# Altium PCB MasterPcb.PcbDoc
Units mm, origin at the board's own origin, x right, y up, seen from the top; angles counter-clockwise.
Board outline 103.04 x 113.79 mm, 2 copper layers (Top Layer, Bottom Layer); 52 components, 52 nets, 245 pads, 110 vias.
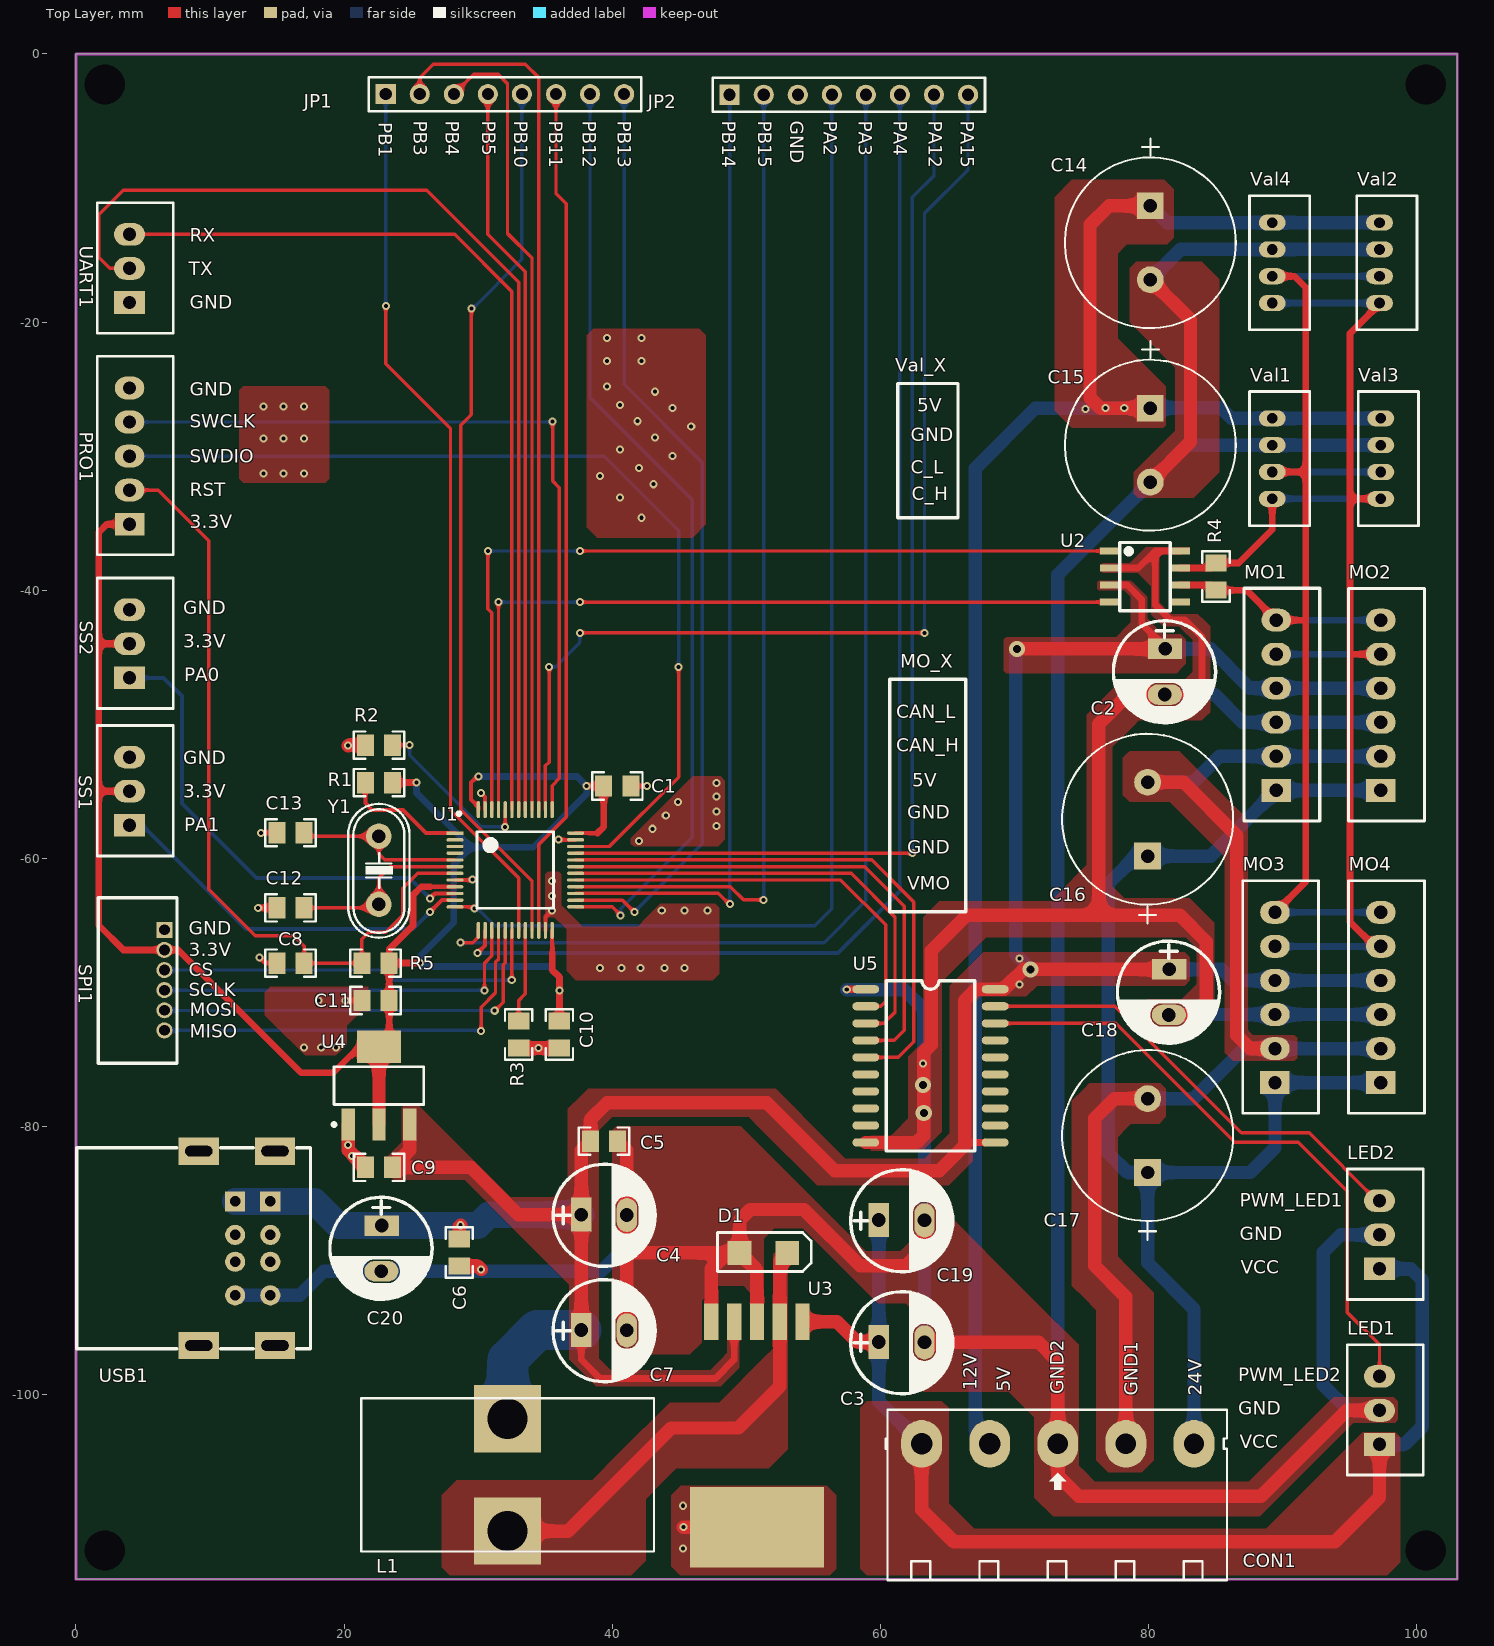
[diagram p0: Top Layer view]
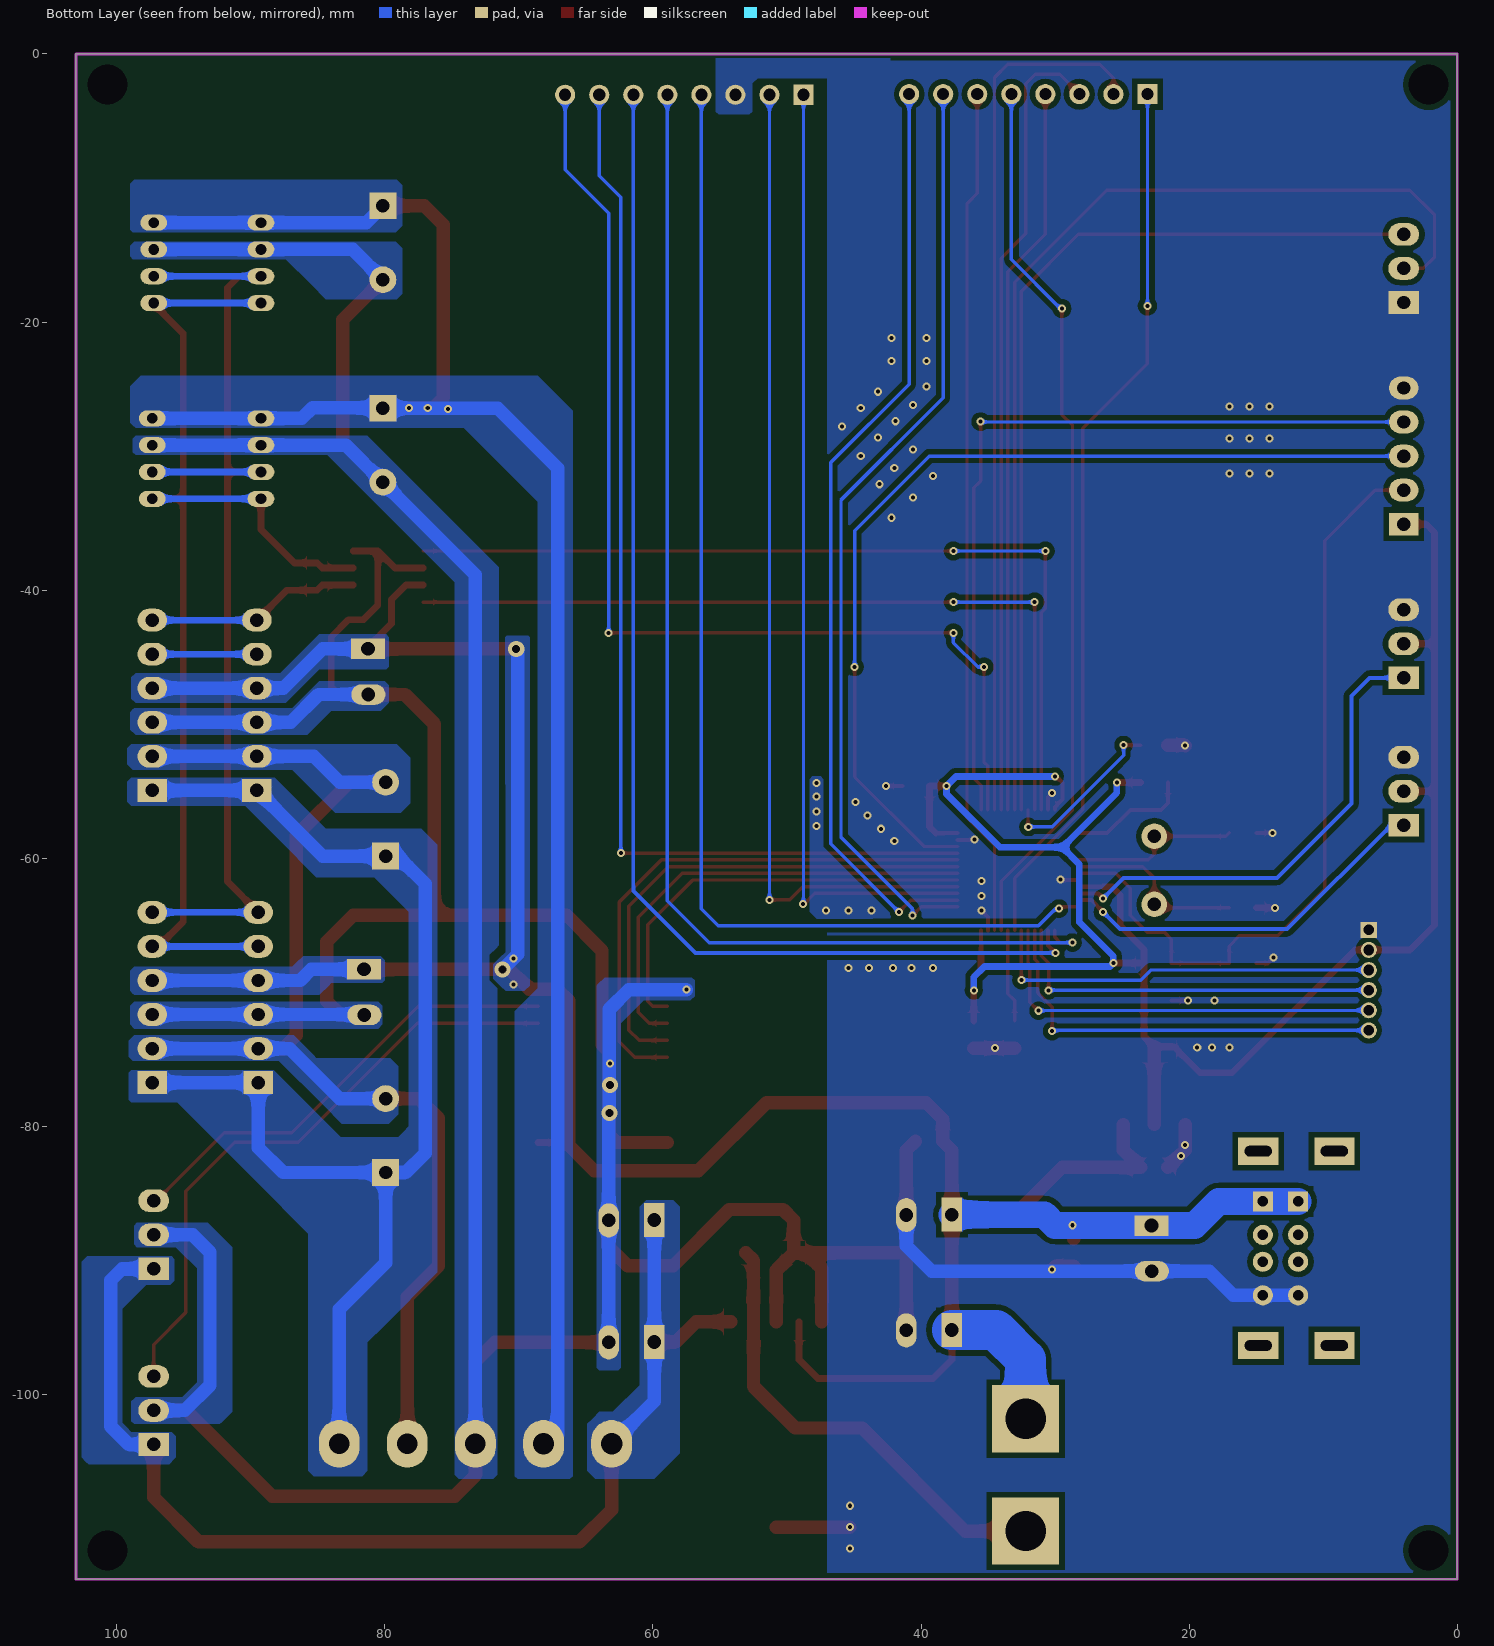
[diagram p1: Bottom Layer view, seen from below]

## Layer stack, top to bottom
Top Solder: solder mask 0.0102, Solder Resist, Dk 3.5
Top Layer: signal copper 0.0356
Dielectric 1: dielectric 0.32, FR-4, Dk 4.8
Bottom Layer: signal copper 0.0356
Bottom Solder: solder mask 0.0102, Solder Resist, Dk 3.5

## Board outline
0,-113.792 103.045,-113.792 103.045,0 0,0

## Design rules (kind name [scope] priority, off if disabled: settings)
Clearance [All] p1: gap=0.2
HoleSize [All] p1: absolutevalues=TRUE maxlimit=2.54 minlimit=0.3 maxpercent=80.000 minpercent=20.000
MinimumSolderMaskSliver [All] p1: minsoldermaskwidth=0
PolygonConnect [All] p1: connectstyle=Direct reliefconductorwidth=0.254 reliefentries=4 polygonreliefangle="90 Angle" airgapwidth=0.254
RoutingVias [All] p1: holewidth=1 width=2 viastyle="Through Hole" minholewidth=0.3 minwidth=0.3 maxholewidth=2 maxwidth=5
SilkToBoardRegionClearance [All] p1 off:
SilkToSolderMaskClearance [IsPad] p1: minsilkscreentomaskgap=0 clearancetoexposedcopper=TRUE
SolderMaskExpansion [All] p1: expansion=0.102
Width [All] p1: maxlimit=5 minlimit=0.254 preferedwidth=0.508
26 further rules are at their usual default settings.

## Components (designator, comment, footprint, x,y, rotation, side; value= is the part's Value field where it differs from the comment)
C1 "104" 0805_HV 40.386,-54.61 r180 top
C2 "390uF" CP1/3.0 81.244,-46.086 r270 top
C3 "390uF" CP1/3.0 61.6,-96.1 r0 top
C4 "390uF" CP1/3.0 39.4,-86.6 r0 top
C5 "104" 0805_HV 39.4,-81.1 r180 top
C6 "104" 0805_HV 28.6,-89.4 r90 top
C7 "390uF" CP1/3.0 39.4,-95.2 r0 top
C8 "104" 0805_HV 16.002,-67.818 r0 top
C9 "105" 0805_HV 22.606,-83.058 r0 top
C10 "105" 0805_HV 36.068,-73.152 r90 top
C11 "105" 0805_HV 22.352,-70.612 r0 top
C12 "22P" 0805_HV 16,-63.7 r0 top
C13 "22P" 0805_HV 16,-58.1 r0 top
C14 "390uF" "CAP_12.5 X 25" 80.144,-14.086 r270 top
C15 "390uF" "CAP_12.5 X 25" 80.144,-29.186 r270 top
C16 "390uF" "CAP_12.5 X 25" 79.944,-57.086 r90 top locked
C17 "390uF" "CAP_12.5 X 25" 79.944,-80.686 r90 top
C18 "390uF" CP1/3.0 81.544,-69.986 r270 top locked
C19 "390uF" CP1/3.0 61.6,-87 r0 top
C20 "390uF" CP1/3.0 22.8,-89.1 r270 top
CON1 "CON 5 EDG 5.08_MH" "Con 5 EDG 5.08" 73.244,-103.686 r0 top locked
D1 "IN5822" SOD123 50.4,-88.8 r180 top
JP1 "Jump 8_MH" "Jump 8" 32,-3 r0 top
JP2 "Jump 8_MH" "Jump 8" 57.658,-3.048 r0 top
L1 "100uF" IND_2118-V-RC 32.2,-106 r90 top locked
LED1 "Header 3_MH" "HEADER 3" 97.244,-101.186 r90 top
LED2 "Header 3_MH" "HEADER 3" 97.244,-88.086 r90 top
MO1 "Header 6" "HEADER 6" 89.544,-48.586 r90 top
MO2 "Header 6" "HEADER 6" 97.344,-48.586 r90 top
MO3 "Header 6" "HEADER 6" 89.444,-70.386 r90 top
MO4 "Header 6" "HEADER 6" 97.344,-70.386 r90 top
PRO1 "Header 5_MH" "HEADER 5" 4,-30 r90 top
R1 "0R" 0805_HV 22.606,-54.356 r0 top
R2 "100K" 0805_HV 22.606,-51.562 r0 top
R3 "100K" 0805_HV 33.02,-73.152 r270 top
R4 "120" 0805_HV 85.044,-38.986 r90 top
R5 "10K" 0805_HV 22.352,-67.818 r0 top
SPI1 "Jump 6" "ZH 1.5 6P" 6.604,-69.088 r270 top
SS1 "Header 3_MH" "HEADER 3" 4,-55 r90 top
SS2 "Header 3_MH" "HEADER 3" 4,-44 r90 top
U1 "STM32F103C8T6 LQFP48 _MH" LQFP48 32.8,-60.9 r0 top
U2 "TJA1050T/CM,118" "SOP 8" 79.744,-38.986 r270 top
U3 "LM2576HVS" TO263-5 50.8,-94.6 r180 top locked
U4 "AMS1117-3.3V SOT223 _MH" SOT223 22.606,-76.962 r0 top
U5 "74HC573" SOIC-20 63.744,-75.486 r0 top
UART1 "Header 3_MH" "HEADER 3" 4,-16 r90 top
USB1 "USB A CAI_DOI_MH" USB_KEP 14.5,-89.1 r90 top
Val1 "Header 4" JST-PH2.00-4P 89.244,-30.186 r90 top
Val2 "Header 4" JST-PH2.00-4P 97.244,-15.586 r90 top
Val3 "Header 4" JST-PH2.00-4P 97.344,-30.186 r90 top
Val4 "Header 4" JST-PH2.00-4P 89.244,-15.586 r90 top
Y1 "8MHZ" XT2 22.6,-60.9 r90 top

## Footprints (in the part's own frame and the unit in brackets; to place one, negate y for a bottom-side part, rotate by r counter-clockwise, add the part's x,y. Pads: shape width x height; smd on the part's side, far side on the other; paste and mask are expansions set on the pad)
0805_HV [mil] "0805 with 30mil clearance between pads"
  rect 50x63 smd: 1(-40,0) 2(40,0)
  silkscreen extent -74,-40 74,40, body extent -43,-29 43,29, height 57
"CAP_12.5 X 25" [mm] "0805 with 30mil clearance between pads"
  rect 2x2 hole 1 mask-25.4: 1(-2.756,0)
  round 2 hole 1 mask-25.4: 2(2.756,0)
  silkscreen extent -7.77,-6.37 6.37,6.38, body extent -6.25,-6.24 6.23,6.24, height 24.99
"Con 5 EDG 5.08" [mil]
  oval 120x140 hole 62.99: 1(-400,0) 2(-200,0)
  oval 120x140 hole 60: 3(0,0) 4(200,0) 5(400,0)
  silkscreen extent -505,-400 497,100, body extent -498,-403 498,69, height 334
CP1/3.0 [mil]
  rect 60x100 hole 40: 1(-67,0.5)
  oval 60x100 hole 40: 2(67,-0.5)
  silkscreen extent -150,-151 150,148, body extent -156,-161 159,154, height 453
"HEADER 3" [mm]
  rect 1.7x2.3 hole 1 paste+0: 1(-2.54,0)
  oval 1.7x2.3 hole 1 paste+0: 2(0,0) 3(2.54,0)
  silkscreen extent -4.83,-3.25 4.9,2.41
"HEADER 5" [mm]
  rect 1.7x2.2 hole 1: 1(-5.08,0)
  oval 1.7x2.2 hole 1: 2(-2.54,0) 3(0,0) 4(2.54,0) 5(5.08,0)
  silkscreen extent -7.37,-3.25 7.44,2.41
"HEADER 6" [mm]
  rect 1.7x2.2 hole 1: 1(-6.35,0)
  oval 1.7x2.2 hole 1: 2(-3.81,0) 3(-1.27,0) 4(1.27,0) 5(3.81,0) 6(6.35,0)
  silkscreen extent -8.64,-3.25 8.71,2.41
IND_2118-V-RC [mm] "INDUCTOR,2 LEAD,VERTICAL MOUNT,8.382mm PITCH,TH"
  rect 5x5 hole 3: 1(-4.191,0) 2(4.191,0)
  silkscreen extent -5.72,-10.92 5.72,10.92, body extent -5.72,-10.92 5.72,10.92, height 21.84
JST-PH2.00-4P [mm]
  oval 1.2x2 hole 0.8 paste+0: 1(3,0) 2(1,0) 3(-1,0) 4(-3,0)
  silkscreen extent -5,-2.8 5,1.7, body extent -4.93,-2.97 4.93,1.7, height 5.89
"Jump 8" [mm]
  rect 1.5x1.5 hole 0.9: 1(-8.89,0)
  round 1.5 hole 0.9: 2(-6.35,0) 3(-3.81,0) 4(-1.27,0) 5(1.27,0) 6(3.81,0) 7(6.35,0) 8(8.89,0)
  silkscreen extent -10.16,-1.27 10.16,1.27, body extent -10.16,-1.27 10.16,1.27, height 7
LQFP48 [mm]
  rect 1.27x0.25 smd: 1(-4.524,2.775)
  oval 1.27x0.25 smd: 2(-4.524,2.275) 3(-4.524,1.775) 4(-4.524,1.275) 5(-4.524,0.775) 6(-4.524,0.275) 7(-4.524,-0.225) 8(-4.524,-0.725) 9(-4.524,-1.225) 10(-4.524,-1.725) 11(-4.524,-2.225) 12(-4.524,-2.725) 25(4.473,-2.725) 26(4.473,-2.225) 27(4.473,-1.725) 28(4.473,-1.225) 29(4.473,-0.725) 30(4.473,-0.225) 31(4.473,0.275) 32(4.473,0.775) 33(4.473,1.275) 34(4.473,1.775) 35(4.473,2.275) 36(4.473,2.775)
  oval 0.25x1.27 smd: 13(-2.775,-4.473) 14(-2.275,-4.473) 15(-1.775,-4.473) 16(-1.275,-4.473) 17(-0.775,-4.473) 18(-0.275,-4.473) 19(0.225,-4.473) 20(0.725,-4.473) 21(1.225,-4.473) 22(1.725,-4.473) 23(2.225,-4.473) 24(2.725,-4.473) 37(2.725,4.524) 38(2.225,4.524) 39(1.725,4.524) 40(1.225,4.524) 41(0.725,4.524) 42(0.225,4.524) 43(-0.275,4.524) 44(-0.775,4.524) 45(-1.275,4.524) 46(-1.775,4.524) 47(-2.275,4.524) 48(-2.775,4.524)
  silkscreen extent -4.35,-2.82 2.82,4.35, body extent -4.53,-4.47 4.47,4.53, height 1.5
SOD123 [mil]
  rect 70x70 smd: 1(35,25) 2(-105,25)
  silkscreen extent -175,-35 100,80, body extent -139,-29 66,73, height 95
SOIC-20 [mm]
  oval 2x0.6 smd: 1(-4.826,5.715) 2(-4.826,4.445) 3(-4.826,3.175) 4(-4.826,1.905) 5(-4.826,0.635) 6(-4.826,-0.635) 7(-4.826,-1.905) 8(-4.826,-3.175) 9(-4.826,-4.445) 10(-4.826,-5.715) 11(4.826,-5.715) 12(4.826,-4.445) 13(4.826,-3.175) 14(4.826,-1.905) 15(4.826,-0.635) 16(4.826,0.635) 17(4.826,1.905) 18(4.826,3.175) 19(4.826,4.445) 20(4.826,5.715)
  silkscreen extent -3.3,-6.35 3.3,6.35, body extent -5.31,-6.5 5.31,6.5, height 2.56
"SOP 8" [mil] "LQFP64"
  rect 20x60 smd: 1(-75,-102.5) 2(-25,-102.5) 3(25,-102.5) 4(75,-102.5) 5(75,102.5) 6(25,102.5) 7(-25,102.5) 8(-75,102.5)
  silkscreen extent -100,-75 100,75, body extent -98,-120 100,117, height 63
SOT223 [mm]
  rect 1x2.4 smd: 1(-2.3,-2.9) 2(0,-2.9) 3(2.3,-2.9)
  rect 3.3x2.4 smd: 4(0,2.9)
  silkscreen extent -3.47,-3.02 3.35,1.4, body extent -3.25,-3.56 3.25,3.4, height 1.68
TO263-5 [mm] "LM2576-SMD"
  rect 1.07x2.75 smd: 1(-3.4,-0.025) 2(-1.7,-0.025) 3(0,-0.025) 4(1.7,-0.025) 5(3.4,-0.025)
  rect 10x6 smd: 6(0,15.289)
  body extent -5,-0.38 5,15.29, height 4.79
USB_KEP [mm]
  rect 1.5x1.5 hole 0.787: 1(3.5,0) 8(3.5,2.62)
  round 1.5 hole 0.787: 2(1,0) 3(-1,0) 4(-3.5,0) 5(-3.5,2.62) 6(-1,2.62) 7(1,2.62)
  rect 2.032x3 hole 0.787 slot 2.032 at 90 deg: 9(7.25,5.33) 10(7.25,-0.35) 11(-7.25,-0.35) 12(-7.25,5.33)
  silkscreen extent -7.5,-3 7.5,14.45, body extent -7.83,-1.36 7.87,16.24, height 16.1
XT2 [mm] "Footpin for Crystal 2 pin"
  round 1.905 hole 1: 1(-2.54,0) 2(2.54,0)
  silkscreen extent -5.03,-2.29 4.96,2.29, body extent -5.93,-2.36 5.42,2.29, height 3.5
"ZH 1.5 6P" [mm]
  rect 1.2x1.2 hole 0.8: 1(-3.749,0)
  round 1.2 hole 0.8: 2(-2.25,0) 3(-0.749,0) 4(0.749,0) 5(2.25,0) 6(3.749,0)
  silkscreen extent -6.15,-4.93 6.2,0.94, body extent -5.96,-4.75 6.04,0.25, height 3.71

## Part data
C1 C8: library part "Capacitor 0805", "Ceramic Chip Capacitor - Standard"
C2 C3 C4 C7 C18 C19 C20: library part "Capacitor TuHoa"
C5 C6 C9 C10 C11 C12 C13: library part CM, "Cap SMD"
C14 C15 C16 C17: library part "Capacitor TuHoa", "CAP ALUM 390UF 20% 50V RADIAL"
CON1: "CON 5 EDG 5.08 (xanh cong)"
D1: library part "Diode S4 SOD123 ( 1N5819 SOD123)_MH", "Diode S4 SOD123 ( 1N5819 SOD123)"
JP1 JP2: "Jump 8P 2.54"
L1: library part "Inductor Lm2576_MH", "cuon cam"
LED1 LED2 SS1 SS2 UART1: "Header 3P XH2.54 th?ng"
MO1 MO2 MO3 MO4: "Header, 6-Pin"
PRO1: "Header 5P XH2.54 th?ng"
R1 R2 R3 R4 R5: library part "R nho", "RES, 100, 1%, 0.1 W, 0402"
SPI1: "Jump 6P 2.54"
U3: library part "LM2576HVS-5.0V BUCK 5V 3A TO263-5 _MH", "LM2576HVS-5.0V BUCK 5V 3A TO263-5 _MH"
U5: library part "74HC573 DIP20 IC Flip-Flop_MH", "Octal D-Type Latch with 3-State Output Non-Inverting"
Val1 Val2 Val3 Val4: "Header, 4-Pin"
Y1: library part "CRYSTAL_49S DIP_MH", "Crystal Oscillator"

## Free pads (board coordinates)
  round 2.3 hole 3 paste+0: 0(100.696,-111.633) 1(100.696,-2.286) 2(2.144,-2.286) 3(2.144,-111.633)

## Via types
v1: diameter 0.6, hole 0.3, Top Layer to Bottom Layer, tented both sides, 106 vias
v2: diameter 1.2, hole 0.6, Top Layer to Bottom Layer, tented both sides, 4 vias

## Nets (pads, with @x,y where several pads share a name; then routed paths per layer and width w, separated by ;. In a path a pad name is that pad's centre, name@x,y a point inside that pad or via, vN(x,y) a via of type N, cw(c..) or ccw(c..) an arc to the next point about the centre after c; other vN are vias at no path point)
3.3V: C1.2 C10.2 C11.2 PRO1.1 R1.2 R5.2 SPI1.2 SS1.2 SS2.2 U1.9 U1.24 U1.36 U1.48 U4.2 U4.4 | length 152.7
  Top Layer w0.3: 26.416,-62.125 U1.9 ; v1@29.972,-53.848 29.464,-54.356 29.464,-55.626 30.025,-56.187 U1.48 ; 35.525,-67.056 U1.24 ; U1.36 38.903,-58.125
  Top Layer w0.5: SS1.2 1.7,-55 ; SS2.2 1.7,-44 ; PRO1.1 2.32,-35.08 1.7,-35.7 1.7,-44 ; R1.2 v1(25.4,-54.356) ; v1(25.654,-67.818) R5.2 ; 26.416,-62.125 25.759,-62.125 25.146,-62.738 25.146,-65.024 23.368,-66.802 R5.2 ; 35.525,-67.056 35.525,-68.325 36.068,-68.868 v1(36.068,-69.85) C10.2 ; v1(38.1,-54.61) C1.2 39.37,-57.658 38.903,-58.125 ; 1.7,-55 1.7,-65 3.538,-66.838 SPI1.2 7.638,-66.838 16.8,-76 19.2,-76 21.138,-74.062 U4.4 23.368,-73.3 C11.2 R5.2 ; 1.7,-55 1.7,-44
  Top Layer w1: U4.2 U4.4
  Bottom Layer w0.5: v1(25.4,-54.356) 25.4,-55.118 29.464,-59.182 ; v1(30.025,-53.901) 37.391,-53.901 v1(38.1,-54.61) 38.1,-55.2 34.118,-59.182 29.464,-59.182 ; v1(36.068,-69.85) 36.068,-68.868 35.272,-68.072 25.908,-68.072 v1(25.654,-67.818) 25.654,-67.31 28.194,-64.77 28.194,-60.452 29.464,-59.182
5V_RC: C14.1 C15.1 CON1.2 Val1.1 Val2.1 Val3.1 Val4.1 | length 146.1
  Top Layer w1: C15.1 76.43,-26.43 75.644,-25.644 75.644,-12.756 77.07,-11.33 C14.1
  Bottom Layer w1: CON1.2 67.1,-102.622 67.1,-30.9 71.57,-26.43 C15.1 80.174,-26.4 85.4,-26.4 86.186,-27.186 Val1.1 Val3.1 ; C14.1 81.4,-12.586 Val4.1 Val2.1
  other v1: 75.3,-26.5 76.8,-26.43 78.2,-26.43
12V: C3.1 C19.1 CON1.1 LED1.1 LED2.1 U3.1 | length 87.9
  Top Layer w1: U3.1 56.775,-94.575 58.287,-96.087 C3.1 ; CON1.1 63.084,-108.584 65.5,-111 93.9,-111 97.244,-107.656 LED1.1
  Bottom Layer w1: C19.1 C3.1 59.898,-100.5 CON1.1 ; LED1.1 99.104,-103.726 100.444,-102.386 100.444,-91.486 99.584,-90.626 LED2.1
24V: C16.1 C17.1 CON1.5 MO1.1 MO2.1 MO3.1 MO4.1 | length 91.6
  Bottom Layer w1: CON1.5 83.404,-93.646 79.944,-90.186 C17.1 ; MO4.1 MO3.1 89.444,-81.586 87.588,-83.442 C17.1 ; MO2.1 MO1.1 84.638,-59.842 C16.1 79.058,-59.842 77,-61.9 77,-82 78.442,-83.442 C17.1
BOOT0: R2.2 U1.44 | length 12.6
  Top Layer w0.254: R2.2 v1(24.892,-51.562) ; v1(32.004,-57.658) 32.025,-57.637 U1.44
  Bottom Layer w0.254: v1(24.892,-51.562) 24.892,-52.324 30.226,-57.658 v1(32.004,-57.658)
BOOT1: R3.1 U1.20 | length 7
  Top Layer w0.254: R3.1 33.02,-70.612 33.525,-70.107 U1.20
CAN_H: MO1.5 MO2.5 MO3.5 MO4.5 R4.2 U2.7 Val1.4 Val2.4 Val3.4 Val4.4 | length 96.8
  Top Layer w0.5: U2.7 84.663,-38.351 R4.2 86.744,-37.97 89.244,-35.47 Val1.4 ; 95.134,-44.776 MO2.5 ; Val2.4 97.244,-18.656 95.044,-20.856 95.044,-33.186 ; MO4.5 96.876,-66.576 95.044,-64.744 95.044,-33.186 ; Val3.4 95.044,-33.186
  Bottom Layer w0.5: Val1.4 Val3.4 ; Val4.4 Val2.4 ; MO3.5 MO4.5 ; MO1.5 MO2.5
CAN_L: MO1.6 MO2.6 MO3.6 MO4.6 R4.1 U2.6 Val1.3 Val2.3 Val3.3 Val4.3 | length 95.2
  Top Layer w0.5: U2.6 84.663,-39.621 R4.1 87.31,-40.002 MO1.6 91.694,-42.236 91.744,-42.186 ; Val1.3 91.744,-31.186 ; Val4.3 90.886,-16.586 91.744,-17.444 91.744,-31.186 ; MO3.6 91.744,-61.736 91.744,-42.186 ; 91.744,-42.186 91.744,-31.186
  Bottom Layer w0.5: Val1.3 Val3.3 ; Val4.3 Val2.3 ; MO3.6 MO4.6 ; MO1.6 MO2.6
CAN_RX: U1.45 U2.4 | length 61.1
  Top Layer w0.254: U1.45 v1(31.525,-40.894) ; v1(37.592,-40.891) U2.4
  Bottom Layer w0.254: v1(31.525,-40.894) v1@37.589,-40.894
CAN_TX: U1.46 U2.1 | length 65.8
  Top Layer w0.254: v1(30.734,-37.084) 30.734,-41.402 31.025,-41.693 U1.46 ; v1(37.592,-37.081) U2.1
  Bottom Layer w0.254: v1(30.734,-37.084) 30.737,-37.081 v1(37.592,-37.081)
GND: C16.2 C17.2 CON1.4 MO1.2 MO2.2 MO3.2 MO4.2 | length 93.4
  Top Layer w1: CON1.4 78.324,-92.724 76,-90.4 76,-79.4 77.47,-77.93 C17.2 ; C16.2 82.63,-54.33 86.6,-58.3 86.6,-73.2 87.596,-74.196 MO3.2
  Bottom Layer w1: C17.2 83.37,-77.93 87.104,-74.196 MO3.2 MO4.2 ; C16.2 83.37,-54.33 85.304,-52.396 MO2.2
GND_MCU: C1.1 C2.2 C3.2 C4.2 C5.1 C6.1 C7.2 C8.1 C9.1 C10.1 C11.1 C12.1 C13.1 C14.2 C15.2 C18.2 C19.2 C20.2 CON1.3 D1.1 JP2.3 LED1.2 LED2.2 MO1.3 MO2.3 MO3.3 MO4.3 PRO1.5 R2.1 R3.2 SPI1.1 SS1.3 SS2.3 U1.8 U1.23 U1.35 U1.47 U2.2 U2.8 U3.3 U3.5 U3.6 U4.1 U5.1 U5.10 UART1.1 USB1.4 USB1.5 Val1.2 Val2.2 Val3.2 Val4.2 | length 466.2
  Top Layer w0.3: v1(13.7,-67.4) 14.118,-67.818 C8.1 ; v1(13.8,-58.1) C13.1 ; v1(20.1,-70.6) 20.112,-70.612 C11.1 ; U1.8 29.575,-61.625 v1(29.6,-61.6) ; v1(30.226,-55.118) 30.525,-55.417 U1.47 ; U1.23 35.025,-64.375 v1(35.5,-63.9) ; v1(36,-58.6) 36.012,-58.6 36.037,-58.625 U1.35 ; C1.1 42.59,-54.61 v1(42.6,-54.6)
  Top Layer w0.5: v1(13.6,-63.7) C12.1 ; v1(57.5,-69.8) 57.5,-69.788 57.483,-69.771 U5.1 ; U2.2 79.249,-38.351 80.519,-37.081 ; C2.2@81.5,-47.788 83.412,-47.788 84,-47.2 84,-43.5 82.7,-42.2 81.6,-42.2 80.519,-41.119 80.519,-37.081 ; U2.8 80.519,-37.081
  Top Layer w1: v1(20.3,-51.6) 20.338,-51.562 R2.1 ; U4.1 20.306,-81.774 C9.1 ; C6.1 29.964,-90.416 v1(30.226,-90.678) ; R3.2 C10.1 ; C5.1 41.102,-81.786 C4.2 41.102,-89.4 ; C7.2 41.102,-89.4 ; v1(45.311,-109.889) U3.6 ; U3.5 47.4,-90.6 48.565,-89.435 D1.1 ; U3.3 50.8,-90.724 D1.1 ; U5.10 62.699,-81.201 63.246,-80.654 v2(63.246,-78.994) 63.246,-74.454 63.8,-73.9 63.8,-66.9 66.438,-64.262 76.3,-64.262 ; C3.2 71.813,-96.113 73.244,-97.544 CON1.3 73.244,-106.044 74.8,-107.6 88.4,-107.6 90.6,-105.4 94.814,-101.186 LED1.2 ; C19.2 63.302,-88.998 61.9,-90.4 58.5,-90.4 54.3,-86.2 50.3,-86.2 49.511,-86.989 D1.1 ; C15.2 83.144,-28.942 83.144,-19.842 C14.2 ; C2.2@81.5,-47.788 C2.2 78.5,-47.788 76.3,-49.988 76.3,-64.262 ; C18.2 83.312,-71.688 84.328,-70.672 84.328,-66.228 82.362,-64.262 76.3,-64.262 ; 41.102,-89.4 41.137,-89.435 D1.1
  Bottom Layer w1: USB1.5 USB1.4 16.7,-92.6 18.498,-90.802 C20.2 39.198,-90.802 41.102,-88.898 C4.2 ; v1(57.5,-69.8) 61.8,-69.8 63.246,-71.246 v2(63.246,-78.994) 63.302,-79.05 C19.2 C3.2 ; CON1.3 73.244,-38.842 C15.2 82.9,-29.186 Val1.2 Val3.2 ; C14.2 82.4,-14.586 Val4.2 Val2.2 ; C2.2 84.946,-47.788 87.014,-49.856 MO1.3 MO2.3 ; C18.2 81.563,-71.656 MO3.3 MO4.3 ; LED1.2 94.93,-101.186 93.044,-99.3 93.044,-89.386 94.344,-88.086 LED2.2
  other v1: 45.3,-111.5 45.3,-108.3 20.6,-82.2 20.3,-81.4 63.2,-75.3 34.5,-74.168 17,-74.1 18.3,-74.1 19.4,-74.1 18.1,-70.6 39.1,-68.2 40.7,-68.2 42.1,-68.2 43.9,-68.2 45.4,-68.2 43.7,-63.9 45.4,-63.9 47.1,-63.9 35.5,-62.8 35.5,-61.7 42,-58.7 43,-57.8 47.8,-57.6 44,-56.8 47.8,-56.5 44.9,-55.8 47.8,-55.4 47.8,-54.4 42.2,-34.6 40.6,-33.1 43.1,-32.1 39.1,-31.5 14,-31.3 15.5,-31.3 17,-31.3 42,-30.9 44.5,-30 40.6,-29.5 14,-28.7 15.5,-28.7 17,-28.7 43.2,-28.6 45.9,-27.8 41.9,-27.4 44.5,-26.4 14,-26.3 15.5,-26.3 17,-26.3 40.6,-26.2 43.2,-25.2 39.6,-24.8 39.6,-22.9 42.2,-22.9 39.6,-21.2 42.2,-21.2
  other v2: 63.2,-76.9
MISO: SPI1.6 U1.16 | length 31.7
  Top Layer w0.254: v1(30.226,-72.898) 30.226,-71.12 31.296,-70.05 31.296,-67.764 31.525,-67.535 U1.16
  Bottom Layer w0.254: SPI1.6 30.165,-72.837 v1(30.226,-72.898)
MO_5V: C2.1 C4.1 C5.2 C6.2 C7.1 C9.2 C18.1 C20.1 L1.2 MO1.4 MO2.4 MO3.4 MO4.4 U2.3 U3.4 U4.3 U5.11 U5.20 USB1.1 USB1.8 | length 228.4
  Top Layer w0.5: C7.1@37.698,-94.6 C7.1 37.698,-97.398 39.1,-98.8 47.7,-98.8 49.1,-97.4 U3.4 ; 66.294,-81.201 U5.11 ; U2.3 78.421,-39.621 79.5,-40.7 79.5,-42.5 81.257,-44.257 C2.1
  Top Layer w1: U4.3 24.906,-81.774 C9.2 29.464,-83.058 32.993,-86.587 C4.1 ; C6.2 28.6,-87.478 v1(28.702,-87.376) ; C7.1@37.698,-94.6 C4.1 ; v2(70.2,-44.4) 70.216,-44.384 C2.1 ; C18.1 v2(71.216,-68.284) 70.716,-68.284 69.229,-69.771 U5.20 67.135,-69.771 66.294,-70.612 66.294,-81.201 66.294,-81.406 64.388,-83.312 56.612,-83.312 51.532,-78.232 39.624,-78.232 38.384,-79.472 C5.2 37.698,-81.786 C4.1
  Bottom Layer w1: v2(70.2,-44.4) 70.1,-44.5 70.1,-67.168 v2(71.216,-68.284) ; C2.1 84.642,-44.384 87.574,-47.316 MO1.4 MO2.4 ; C18.1 85.484,-68.284 86.316,-69.116 MO3.4 MO4.4
  Bottom Layer w2: USB1.8 USB1.1 17.8,-85.6 19.598,-87.398 C20.1 30.002,-87.398 30.813,-86.587 C4.1
  Bottom Layer w3: L1.2 32.2,-97.4 34.413,-95.187 C7.1
  other v1: 70.4,-69.4 70.4,-67.468
MOSI: SPI1.5 U1.17 | length 31
  Top Layer w0.254: v1(31.242,-71.374) 31.885,-70.731 31.885,-67.937 32.025,-67.797 U1.17
  Bottom Layer w0.254: SPI1.5 v1(31.242,-71.374)
NetD1_2: D1.2 L1.1 U3.2 | length 35
  Top Layer w1: L1.1 36.709,-110.191 44.4,-102.5 49.4,-102.5 52.5,-99.4 U3.2 52.5,-90.002 D1.2
OSCIN: C13.2 U1.5 Y1.2 | length 12.9
  Top Layer w0.254: C13.2 17.276,-58.36 Y1.2 22.6,-59.684 23.041,-60.125 U1.5
OSCOUT: C12.2 U1.6 Y1.1 | length 13.7
  Top Layer w0.254: C12.2 22.406,-63.7 Y1.1@22.633,-63.473 ; Y1.1 22.6,-61.474 23.449,-60.625 U1.6
PA0: SS2.1 U1.10 | length 35.9
  Top Layer w0.3: v1(26.416,-62.992) 26.783,-62.625 U1.10
  Bottom Layer w0.3: SS2.1 6.54,-46.54 7.9,-47.9 7.9,-55.906 13.462,-61.468 24.892,-61.468 v1(26.416,-62.992)
PA1: SS1.1 U1.11 | length 28.4
  Top Layer w0.3: v1(26.416,-64.008) 27.299,-63.125 U1.11
  Bottom Layer w0.3: SS1.1 4.962,-57.54 12.7,-65.278 25.146,-65.278 v1(26.416,-64.008)
PA2: JP2.4 U1.12 | length 89.9
  Top Layer w0.254: U1.12 29.589,-63.625 v1(29.718,-63.754)
  Bottom Layer w0.254: v1(29.718,-63.754) 29.972,-63.754 31.242,-65.024 55.118,-65.024 56.388,-63.754 JP2.4
PA3: JP2.5 U1.13 | length 93.6
  Top Layer w0.254: v1(28.702,-66.294) 29.606,-66.294 30.025,-65.875 U1.13
  Bottom Layer w0.254: v1(28.702,-66.294) 55.806,-66.294 58.928,-63.172 JP2.5
PA4: JP2.6 U1.14 | length 94.7
  Top Layer w0.3: v1(29.972,-67.056) 30.525,-66.503 U1.14
  Bottom Layer w0.254: 61.468,-62.1 JP2.6
  Bottom Layer w0.3: v1(29.972,-67.056) 56.844,-67.056 61.468,-62.432 61.468,-62.1
PA12: JP2.7 U1.33 | length 82.3
  Top Layer w0.254: U1.33 v1@62.4,-59.625
  Bottom Layer w0.254: v1(62.4,-59.6) 62.4,-10.7 64.008,-9.092 JP2.7
PA15: JP2.8 U1.38 | length 81.8
  Top Layer w0.254: U1.38 35.025,-53.113 35.306,-52.832 v1(35.306,-45.72) ; v1(37.592,-43.18) 63.28,-43.18 v1(63.3,-43.2)
  Bottom Layer w0.254: v1(35.306,-45.72) 35.78,-45.72 37.592,-43.908 v1(37.592,-43.18) ; v1(63.3,-43.2) 63.3,-11.9 66.548,-8.652 JP2.8
PB1: JP1.1 U1.19 | length 66.5
  Top Layer w0.254: v1(23.114,-18.796) 23.114,-23.114 27.94,-27.94 27.94,-56.388 33.025,-61.473 U1.19
  Bottom Layer w0.254: v1@23.11,-18.792 JP1.1
PB3: JP1.2 U1.39 | length 65.9
  Top Layer w0.254: JP1.2 25.65,-1.782 26.67,-0.762 33.528,-0.762 34.525,-1.759 U1.39
  Bottom Layer w0.254: JP1.2@25.4,-3.25 JP1.2
PB4: JP1.3 U1.40 | length 59.8
  Top Layer w0.254: JP1.3 29.666,-1.524 31.496,-1.524 32.193,-2.221 32.193,-13.397 34.025,-15.229 U1.40
PB5: JP1.4 U1.41 | length 54.5
  Top Layer w0.254: JP1.4 30.73,-13.458 33.525,-16.253 U1.41
PB10: JP1.5 U1.21 | length 66.5
  Top Layer w0.254: v1(29.5,-19) 29.5,-26.9 28.702,-27.698 28.702,-56.388 34.025,-61.711 U1.21
  Bottom Layer w0.254: v1(29.5,-19) 29.6,-19 33.27,-15.33 JP1.5
PB11: JP1.6 U1.22 | length 63.5
  Top Layer w0.254: U1.22 34.525,-58.975 36.576,-56.924 36.576,-11.176 35.81,-10.41 JP1.6
PB12: JP1.7 U1.25 | length 70.3
  Top Layer w0.254: U1.25 40.003,-63.625 v1(40.64,-64.262)
  Bottom Layer w0.254: JP1.7 38.35,-25.65 45.974,-33.274 45.974,-58.42 40.64,-63.754 v1(40.64,-64.262)
PB13: JP1.8 U1.26 | length 70.3
  Top Layer w0.254: U1.26 40.773,-63.125 v1(41.656,-64.008)
  Bottom Layer w0.254: JP1.8 40.89,-24.634 46.736,-30.48 46.736,-58.928 v1(41.656,-64.008)
PB14: JP2.1 U1.27 | length 72.3
  Top Layer w0.254: U1.27 47.925,-62.625 48.768,-63.468 v1@48.768,-63.5
  Bottom Layer w0.254: v1@48.768,-63.5 JP2.1
  other v1: 48.8,-63.4
PB15: JP2.2 U1.28 | length 74.7
  Top Layer w0.254: U1.28 48.825,-62.125 49.8,-63.1 51.162,-63.1 v1@51.308,-63.246
  Bottom Layer w0.254: v1@51.308,-63.246 JP2.2
  other v1: 51.3,-63.1
PC13: U1.2
PC14: U1.3
PC15: U1.4
PWM_CH1: U1.29 U5.2 | length 31.8
  Top Layer w0.254: U1.29 57.053,-61.625 60.4,-64.972 60.4,-70.664 60.023,-71.041 U5.2
PWM_CH2: U1.30 U5.3 | length 34.8
  Top Layer w0.254: U1.30 57.823,-61.125 61.1,-64.402 61.1,-71.488 60.277,-72.311 U5.3
PWM_CH3: U1.31 U5.4 | length 38.2
  Top Layer w0.254: U1.31 58.847,-60.625 61.8,-63.578 61.8,-72.82 61.039,-73.581 U5.4
PWM_CH4: U1.32 U5.5 | length 41
  Top Layer w0.254: U1.32 59.363,-60.125 62.5,-63.262 62.5,-73.7 61.349,-74.851 U5.5
PWM_LED1: LED2.3 U5.19 | length 34.7
  Top Layer w0.254: U5.19 77.499,-71.041 86.944,-80.486 91.986,-80.486 97.046,-85.546 LED2.3
PWM_LED2: LED1.3 U5.18 | length 46.3
  Top Layer w0.254: U5.18 77.569,-72.311 86.444,-81.186 91.186,-81.186 94.844,-84.844 94.844,-93.886 97.244,-96.286 LED1.3
RST: C8.2 PRO1.2 R5.1 U1.7 | length 59.9
  Top Layer w0.254: PRO1.2 6.14,-32.54 9.9,-36.3 9.9,-62.3 13.386,-65.786 16.256,-65.786 17.018,-66.548 C8.2 R5.1 21.336,-66.04 21.844,-65.532 23.114,-65.532 24.384,-64.262 24.384,-62.23 25.489,-61.125 U1.7
RX: U1.43 UART1.3 | length 68.9
  Top Layer w0.254: UART1.3 28.26,-13.46 32.525,-17.725 U1.43
SCLK: SPI1.4 U1.15 | length 28.6
  Top Layer w0.254: v1(30.48,-69.85) 30.48,-67.818 31.025,-67.273 U1.15
  Bottom Layer w0.254: SPI1.4 30.467,-69.837 v1(30.48,-69.85)
SPI_CS: SPI1.3 U1.18 | length 29.9
  Top Layer w0.254: v1(32.512,-69.088) 32.525,-69.075 U1.18
  Bottom Layer w0.254: SPI1.3 22.86,-68.339 23.609,-69.088 v1(32.512,-69.088)
SWCLK: PRO1.4 U1.37 | length 61
  Top Layer w0.254: U1.37 35.525,-54.575 36.068,-54.032 36.068,-32.368 35.56,-31.86 v1(35.56,-27.432)
  Bottom Layer w0.254: PRO1.4 35.532,-27.46 v1(35.56,-27.432)
SWDIO: PRO1.3 U1.34 | length 71.5
  Top Layer w0.254: U1.34 39.775,-59.125 44.958,-53.942 v1(44.958,-45.72)
  Bottom Layer w0.254: PRO1.3 39.398,-30 44.958,-35.56 v1(44.958,-45.72)
TX: U1.42 UART1.2 | length 80.1
  Top Layer w0.254: UART1.2 2.538,-16 1.7,-15.162 1.7,-12 3.54,-10.16 26.16,-10.16 33.025,-17.025 U1.42
VBAT: R1.1 U1.1 | length 9.1
  Top Layer w0.3: R1.1 21.59,-55.88 22.098,-56.388 24.384,-56.388 26.121,-58.125 U1.1
pads on no net: U2.5 U5.6 U5.7 U5.8 U5.9 U5.12 U5.13 U5.14 U5.15 U5.16 U5.17 USB1.2 USB1.3 USB1.6 USB1.7 USB1.9 USB1.10 USB1.11 USB1.12

## Polygon pours and split planes (outlines as drawn)
12V on Bottom Layer "Bottom Layer-No Net" (solid, pour order 39): 96.2,-89.7 98.8,-89.7 102.2,-89.7 102.5,-90 102.6,-90.1 102.6,-91.7 102.6,-104.7 102.3,-105 102.1,-105.2 97.2,-105.2 96.1,-105.2 95.7,-104.8 95.6,-104.7 95.6,-104.1 95.6,-103.1 95.7,-103 95.9,-102.8 96.4,-102.8 98.9,-102.8 99.3,-102.4 99.6,-102.1 99.6,-96.6 99.6,-93.6 98.6,-92.6 97.8,-91.8 96,-91.8 95.7,-91.5 95.7,-90.1 95.7,-89.9 95.9,-89.7
GND_MCU on Bottom Layer "Bottom Layer-No Net" (solid, pour order 37): 98.5,-87.2 93.2,-87.2 92.4,-88 91.4,-89 91.4,-93.9 91.4,-101.3 92.2,-102.1 92.3,-102.2 96.9,-102.2 98.7,-102.2 98.9,-102 98.9,-100.8 98.9,-100.5 98.7,-100.3 98.6,-100.2 97.5,-100.2 95.1,-100.2 94.5,-99.6 94,-99.1 94,-97 94,-90.6 95.3,-89.3 95.6,-89 98.5,-89 98.7,-88.8 98.7,-87.4 98.5,-87.2
GND_MCU on Bottom Layer "Bottom Layer-No Net" (solid, pour order 4): 71.6,-106 71.6,-69.7 72.2,-69.1 72.2,-67.3 72.2,-67.2 71.7,-66.7 71.5,-66.5 71.5,-64.9 71.5,-38.3 80.6,-29.2 81.3,-28.5 98.6,-28.5 98.8,-28.7 98.8,-29.7 98.6,-29.9 96.1,-29.9 84.3,-29.9 81.1,-33.1 74.8,-39.4 74.8,-105.3 74.8,-106 74.5,-106.3 71.9,-106.3
GND_MCU on Bottom Layer "Bottom Layer-No Net" (solid, pour order 8): 97.5,-14 98.7,-14 99,-14.3 99,-14.6 99,-15.1 98.8,-15.3 97.2,-15.3 87.4,-15.3 85.5,-17.2 84.4,-18.3 80,-18.3 79.1,-18.3 78.8,-18 78.7,-17.9 78.7,-16.3 78.7,-14.5 79.2,-14 88.7,-14
GND_MCU on Bottom Layer "Bottom Layer-No Net" (solid, pour order 10): 47,-113.792 47,-84.5 47,0 0,0 0,-113.792
GND_MCU on Bottom Layer "Bottom Layer-No Net" (solid, pour order 12): 46.1,0 46.2,0.1 54.7,0.1 55,0.1 55.3,-0.2 55.3,-2.2 55.3,-4.3 55.1,-4.5 53.4,-4.5 52.8,-4.5 52.6,-4.3 52.6,-3 52.6,-2.2 52.2,-1.8 50.1,-1.8 42.4,-1.8 42.3,-1.7 42.3,-0.3 42.6,0
MO_5V on Bottom Layer "Bottom Layer-No Net" (solid, pour order 24): 69.2,-65.7 69.2,-69.5 69.6,-69.9 70.7,-69.9 71,-69.9 71.3,-69.6 71.9,-69 71.9,-68.3 71.9,-67.9 71.4,-67.4 71,-67 71,-65.5 71,-43.5 70.9,-43.4 70,-43.4 69.3,-43.4 69.2,-43.5 69.2,-43.7 69.2,-65.6
5V_RC on Bottom Layer "Bottom Layer-No Net" (solid, pour order 26): 66,-106.1 66,-26.6 67,-25.6 68.6,-24 89.4,-24 98.2,-24 98.7,-24.5 99,-24.8 99,-26.8 99,-27.5 98.8,-27.7 98.6,-27.9 97.3,-27.9 74.1,-27.9 69.3,-32.7 68.6,-33.4 68.6,-69.7 69.9,-71 70.3,-71.4 70.3,-105.5 70.3,-106.1 70.1,-106.3 66.2,-106.3
5V_RC on Bottom Layer "Bottom Layer-No Net" (solid, pour order 34): 79.1,-9.4 96.4,-9.4 98.7,-9.4 99,-9.7 99,-10.4 99,-13.1 98.8,-13.3 97,-13.3 79.2,-13.3 78.8,-12.9 78.7,-12.8 78.7,-11 78.7,-9.8 79.1,-9.4
GND_MCU on Bottom Layer "Bottom Layer-No Net" (solid, pour order 38): 62.4,-98 62.4,-91 62.4,-72.3 61.3,-71.2 60.7,-70.6 58.9,-70.6 57.2,-70.6 56.9,-70.3 56.9,-69.1 57.1,-68.9 60.1,-68.9 63.6,-68.9 64.1,-69.4 64.2,-69.5 64.2,-71.3 64.2,-98 64,-98.2 63.9,-98.2 62.6,-98.2 62.4,-98
GND_MCU on Bottom Layer "Bottom Layer-No Net" (solid, pour order 40): 79.7,-47.1 79.7,-48.4 80,-48.7 80.3,-49 81.6,-49 84,-49 85.2,-50.2 85.8,-50.8 89.6,-50.8 98.6,-50.8 99,-50.4 99,-49.7 99,-49.1 98.8,-48.9 98.7,-48.8 97,-48.8 86.9,-48.8 85.7,-47.6 84.9,-46.8 80,-46.8
GND_MCU on Bottom Layer "Bottom Layer-No Net" (solid, pour order 42): 80.5,-72.7 89.9,-72.7 98.7,-72.7 99,-72.4 99,-71.4 99,-71 98.7,-70.7 97.3,-70.7 80.5,-70.7 80.2,-71 80.2,-71.8 80.2,-72.4
24V on Bottom Layer "Bottom Layer-No Net" (solid, pour order 44): 98.9,-54 88.9,-54 88.2,-54 86.6,-55.6 84.4,-57.8 79.3,-57.8 77.3,-57.8 76.4,-58.7 76.1,-59 76.1,-67.2 76.1,-90.9 80.1,-94.9 81.3,-96.1 81.3,-103.5 81.3,-105.7 81.7,-106.1 83.6,-106.1 85.3,-106.1 85.7,-105.7 85.7,-103.2 85.7,-88 89.6,-84.1 95.5,-78.2 98.6,-78.2 98.9,-78.2 99.1,-78 99.1,-76.2 99.1,-76 98.9,-75.8 98.7,-75.8 97.6,-75.8 88.3,-75.8 87.7,-76.4 83.3,-80.8 80,-80.8 79,-80.8 78.6,-80.4 78.2,-80 78.2,-78.1 78.2,-64 79.6,-62.6 80.8,-61.4 83.9,-61.4 85.1,-61.4 87.9,-58.6 90.4,-56.1 95.3,-56.1 98.9,-56.1 99.2,-55.8 99.2,-55.4 99.2,-54.3
MO_5V on Bottom Layer "Bottom Layer-No Net" (solid, pour order 54): 79.9,-43.3 84.2,-43.3 84.9,-43.3 86.9,-45.3 87.8,-46.2 89.8,-46.2 98.6,-46.2 98.9,-46.5 98.9,-47.5 98.9,-48.1 98.6,-48.4 95.8,-48.4 87.4,-48.4 85.8,-46.8 84.9,-45.9 79.9,-45.9 79.7,-45.7 79.7,-43.5
MO_5V on Bottom Layer "Bottom Layer-No Net" (solid, pour order 56): 80.3,-67.3 86.1,-67.3 86.6,-67.8 86.9,-68.1 89.5,-68.1 98.7,-68.1 99,-68.4 99,-69.7 99,-69.9 98.8,-70.1 98.7,-70.2 97.4,-70.2 84.9,-70.2 84.2,-69.5 84,-69.3 80.3,-69.3 80.2,-69.3 80,-69.1 80,-67.6
GND on Bottom Layer "Bottom Layer-No Net" (solid, pour order 58): 79,-75.5 79,-79.1 79.3,-79.4 79.7,-79.8 81.5,-79.8 83.2,-79.8 84.6,-78.4 87.9,-75.1 90,-75.1 98.8,-75.1 99.1,-74.8 99.1,-73.7 99.1,-73.6 98.8,-73.3 98.7,-73.2 97.4,-73.2 86.8,-73.2 85.3,-74.7 85.1,-74.9 82.1,-74.9 79.6,-74.9 79,-75.5
GND on Bottom Layer "Bottom Layer-No Net" (solid, pour order 60): 98.7,-51.5 92.9,-51.5 79.1,-51.5 78.4,-52.2 78.1,-52.5 78.1,-54.8 78.1,-55.9 78.4,-56.2 78.8,-56.6 80.2,-56.6 83.7,-56.6 85.3,-55 86.9,-53.4 90.1,-53.4 98.8,-53.4 99.2,-53 99.2,-51.9 99.2,-51.8 98.9,-51.5
GND_MCU on Bottom Layer "Bottom Layer-No Net" (solid, pour order 68): 43.4,-63.1 43.4,-63.024 46.883,-59.541 47.3,-59.124 47.3,-55.9 47.3,-54.1 47.5,-53.9 47.9,-53.9 48.1,-53.9 48.3,-54.1 48.3,-55.8 48.3,-64 47.8,-64.5 47.6,-64.5 45.3,-64.5 43.6,-64.5 42.8,-63.7
12V on Bottom Layer "Bottom Layer-No Net" (solid, pour order 74): 60.5,-85.5 58.5,-85.5 58.1,-85.9 58,-86 58,-88 58,-104.4 59,-105.4 59.9,-106.3 63.8,-106.3 64.3,-106.3 64.5,-106.1 64.9,-105.7 64.9,-104.8 64.9,-102.2 64.5,-101.8 64,-101.3 63.1,-101.3 63,-101.3 61,-99.3 61,-95.4 61,-86 60.5,-85.5 59.9,-85.5
GND_MCU on Top Layer "Bottom Layer-No Net" (solid, pour order 35): 47,-21 46.5,-20.5 45.1,-20.5 38.6,-20.5 38.1,-21 38.1,-35.3 38.9,-36.1 46,-36.1 47,-35.1
GND_MCU on Top Layer "Bottom Layer-No Net" (solid, pour order 6): 84,-15.5 79.4,-15.5 79.1,-15.5 78.6,-16 78.6,-16.9 78.6,-20 80.3,-21.7 82,-23.4 82,-27.3 82,-28.1 80.2,-29.9 78.9,-31.2 78.9,-32.7 78.9,-32.8 79.2,-33.1 80.3,-33.1 83.4,-33.1 84.2,-32.3 85.3,-31.2 85.3,-20.4 85.3,-16.8 84,-15.5
GND_MCU on Top Layer "Bottom Layer-No Net" (solid, pour order 14): 40,-80.7 40,-96.4 40.6,-97 44.7,-97 45.8,-97 46.6,-96.2 46.7,-96.1 46.7,-93.7 46.7,-93 46.9,-92.8 47.8,-91.9 48.8,-91.9 49.8,-91.9 50.2,-92.3 50.5,-92.6 50.5,-93.7 51.1,-93.7 51.3,-93.5 51.3,-89.9 51.3,-88.4 52.1,-87.6 53.5,-87.6 54.2,-87.6 57.3,-90.7 59.8,-93.2 61.6,-93.2 61.9,-93.2 62.2,-93.5 62.4,-93.7 62.4,-95.3 62.4,-99 63,-99.6 63.2,-99.8 67.2,-99.8 69.6,-99.8 70.3,-100.5 71.5,-101.7 71.5,-104.8 71.5,-107.7 72.9,-109.1 77.6,-109.1 88.3,-109.1 93.6,-103.8 95.3,-102.1 96.7,-102.1 98.4,-102.1 98.6,-101.9 98.6,-101 98.6,-100.5 98.3,-100.2 97.2,-100.2 93.8,-100.2 91.1,-102.9 87.5,-106.5 82.7,-106.5 76,-106.5 75.2,-105.7 74.8,-105.3 74.8,-103 74.8,-96.3 71.5,-93 64.2,-85.7 63,-85.7 62.7,-85.7 62.4,-86 62.3,-86.1 62.3,-87.4 62.3,-88.5 61.9,-88.9 61.5,-89.3 60.1,-89.3 58.9,-89.3 56,-86.4 49.6,-80 41.6,-80 40.3,-80 40.1,-80.2 40,-80.3 40,-81.1
NetD1_2 on Top Layer "Bottom Layer-No Net" (solid, pour order 16): 52,-89.5 52,-96.3 52,-96.6 51.4,-97.2 48,-100.6 45.1,-100.6 44.3,-100.6 40.5,-104.4 38.5,-106.4 33.6,-106.4 28.4,-106.4 27.5,-107.3 27.3,-107.5 27.3,-112.2 27.3,-112.9 28,-113.6 28.1,-113.7 30.2,-113.7 41.2,-113.7 42.2,-112.7 42.5,-112.4 42.5,-109.8 42.5,-107.8 43.6,-106.7 44.8,-105.5 48.8,-105.5 51.7,-105.5 53,-104.2 53.1,-104.1 53.1,-95.5 53.1,-89.1 52.9,-88.9
GND_MCU on Top Layer "Bottom Layer-No Net" (solid, pour order 18): 55.8,-106.8 45.1,-106.8 44.7,-107.2 44.4,-107.5 44.4,-108.2 44.4,-112.8 44.9,-113.3 45.392,-113.792 47.6,-113.792 55.908,-113.792 56.3,-113.4 56.7,-113 56.7,-107.8 56.7,-107.5 56,-106.8
MO_5V on Top Layer "Bottom Layer-No Net" (solid, remove dead copper, pour order 22): 36.8,-96.5 36.8,-91.8 32.4,-87.4 29,-84 23.9,-84 23.7,-84 23.2,-83.5 23.2,-82.7 23.2,-82.3 23.6,-81.9 24.3,-81.2 24.3,-80.3 24.3,-78.6 24.5,-78.4 25.2,-78.4 25.5,-78.4 25.6,-78.5 32.4,-85.3 34.7,-85.3 35.6,-85.3 36,-84.9 36.7,-84.2 36.7,-82.9 36.7,-78.7 37.7,-77.7 38.2,-77.2 41.1,-77.2 52.2,-77.2 56.1,-81.1 57.4,-82.4 59.2,-82.4 63.3,-82.4 64.5,-81.2 65.2,-80.5 65.2,-77.9 65.2,-69.5 66.8,-67.9 67.7,-67 77.2,-67 82.7,-67 83,-67.3 83.1,-67.4 83.1,-68.1 83.1,-69.1 82.7,-69.5 81.2,-69.5 71.7,-69.5 70.9,-70.3 69.2,-70.3 67.5,-70.3 66.9,-70.9 66.9,-75.7 66.9,-82.6 66,-83.5 65.1,-84.4 63.2,-84.4 55.3,-84.4 51.1,-80.2 50.2,-79.3 46.5,-79.3 40,-79.3 39.3,-80 39,-80.3 39,-81.1 39,-97.3 39.7,-98 39.9,-98.2 44.2,-98.2 47.3,-98.2 48.1,-97.4 48.6,-96.9 48.6,-95.4 48.6,-94.1 48.9,-93.8 49.5,-93.8 49.5,-98 49.2,-98.3 48.1,-99.4 46.2,-99.4 38.8,-99.4 36.9,-97.5 36.8,-97.4
5V_RC on Top Layer "Bottom Layer-No Net" (solid, pour order 28): 81.3,-25.1 81.3,-24.8 79.2,-22.7 77.7,-21.2 77.7,-17.1 77.7,-14.9 78.2,-14.4 78.4,-14.2 81,-14.2 81.4,-14.2 81.8,-13.8 81.9,-13.7 81.9,-11.2 81.9,-10.1 81.2,-9.4 79.3,-9.4 74.3,-9.4 73,-10.7 73,-24 73,-26.6 74.2,-27.8 74.3,-27.9 79,-27.9 81.1,-27.9 81.3,-27.7
GND_MCU on Top Layer "Bottom Layer-No Net" (solid, pour order 36): 59.3,-80.7 60.8,-80.7 61.1,-80.4 62.1,-79.4 62.1,-76.4 62.1,-74.8 63.2,-73.7 63.2,-69.7 63.2,-64.4 64.4,-63.2 68.8,-63.2 72.7,-63.2 73.3,-62.6 75.4,-60.5 75.4,-57.3 75.4,-49.3 77.2,-47.5 77.9,-46.8 81.5,-46.8 82.6,-46.8 83.2,-46.2 83.3,-46.1 83.3,-44.6 83.3,-43.7 82.5,-42.9 82.3,-42.7 81.1,-42.7 80.3,-41.9 80.2,-41.8 80.2,-39.8 80.2,-39.7 79.9,-39.4 79.2,-38.7 78.3,-38.7 76.6,-38.7 76.4,-38.5 76.4,-38.2 76.6,-38 77.7,-38 78.6,-38 79.1,-37.5 79.8,-36.8 81.7,-36.8 83.1,-36.8 83.1,-37.3 81.6,-37.3 81,-37.3 80.9,-37.4 80.8,-37.5 80.8,-38.1 80.8,-40.9 81.5,-41.6 81.7,-41.8 82.1,-41.8 83.7,-41.8 84.2,-42.3 84.6,-42.7 84.6,-44.2 84.6,-49.1 84.2,-49.5 84,-49.7 81.9,-49.7 79.3,-49.7 78.9,-50.1 77.3,-51.7 77.3,-54.5 77.3,-62.1 77.7,-62.5 78.2,-63 79.5,-63 83.1,-63 84.1,-64 84.9,-64.8 84.9,-66.4 84.9,-72 84,-72.9 81.7,-72.9 80.5,-72.9 79.9,-72.3 79.7,-72.1 79.7,-71.2 79.7,-70.8 79.8,-70.7 80,-70.5 81.2,-70.5 82.5,-70.5 82.9,-70.1 83.6,-69.4 83.6,-68.1 83.6,-66.7 83,-66.1 82.8,-65.9 80.6,-65.9 67.9,-65.9 66.9,-66.9 64.6,-69.2 64.6,-70.8 64.6,-80.4 63.3,-81.7 63.2,-81.8 59.3,-81.8
GND on Top Layer "Bottom Layer-No Net" (solid, pour order 48): 80.4,-76.8 75.6,-76.8 75.2,-77.2 74.3,-78.1 74.3,-79.7 74.3,-91.9 75.2,-92.8 76.1,-93.7 76.1,-100.5 76.1,-104.9 76.6,-105.4 77,-105.8 78.1,-105.8 79.5,-105.8 79.9,-105.4 80.4,-104.9 80.4,-104.4 80.4,-92.4 78.4,-90.4 77.7,-89.7 77.7,-87 77.7,-80.8 78.4,-80.1 78.7,-79.8 79.8,-79.8 80.8,-79.8 81.3,-79.3 81.3,-77.3 81.3,-77.2 80.9,-76.8
GND_MCU on Top Layer "Bottom Layer-No Net" (solid, pour order 50): 12.2,-25.1 12.2,-31.7 12.5,-32 15.1,-32 18.6,-32 18.9,-31.7 18.9,-29.9 18.9,-25.1 18.6,-24.8 18.5,-24.8 12.5,-24.8 12.2,-25.1
MO_5V on Top Layer "Bottom Layer-No Net" (solid, pour order 52): 69.2,-45.2 69.2,-43.9 69.2,-43.7 69.3,-43.6 69.4,-43.5 74.4,-43.5 77.6,-43.5 78.4,-42.7 78.7,-42.4 78.7,-41.3 78.7,-40.5 78.5,-40.3 78.2,-40 77.3,-40 76.3,-40 76.2,-39.9 76.2,-39.5 76.2,-39.4 76.3,-39.3 78.4,-39.3 78.7,-39.3 78.9,-39.5 79.9,-40.5 79.9,-41 79.9,-42.1 80.6,-42.8 81.1,-43.3 82.1,-43.3 82.4,-43.3 82.7,-43.6 82.8,-43.7 82.8,-44.2 82.8,-45.5 82.5,-45.8 82.1,-46.2 81.3,-46.2 69.4,-46.2 69.2,-46
GND on Top Layer "Bottom Layer-No Net" (solid, pour order 62): 78.1,-52.5 78.1,-54.8 78.1,-55.3 78.3,-55.5 78.6,-55.8 80.5,-55.8 81.6,-55.8 82.4,-56.6 85.7,-59.9 85.7,-69.2 85.7,-74.5 86.2,-75 86.3,-75.1 89.5,-75.1 90.9,-75.1 91.1,-74.9 91.1,-74.1 91.1,-73.4 90.9,-73.2 89.5,-73.2 87.8,-73.2 87.6,-73 87.4,-72.8 87.4,-71.8 87.4,-57.1 85.9,-55.6 82.3,-52 80.6,-52 78.6,-52 78.4,-52.2
GND_MCU on Top Layer "Bottom Layer-No Net" (solid, pour order 64): 21.8,-69.6 15.6,-69.6 14.5,-69.6 14.2,-69.9 14.1,-70 14.1,-70.9 14.1,-71.7 14.7,-72.3 17.1,-74.7 18.7,-74.7 19.4,-74.7 19.7,-74.4 20.2,-73.9 20.2,-72.8 20.2,-72.5 20.9,-71.8 21.3,-71.4 21.8,-71.4 21.8,-69.6
GND_MCU on Top Layer "Bottom Layer-No Net" (solid, pour order 66): 35,-61.2 35,-64.1 34.9,-64.2 34.9,-64.6 35.1,-64.6 35.3,-64.4 35.7,-64.4 36.6,-65.3 36.6,-67 36.6,-68.4 37.3,-69.1 39.6,-69.1 42.8,-69.1 43.4,-68.5 43.4,-67.5 43.4,-65.7 43,-65.3 42.8,-65.1 41.3,-65.1 37.8,-65.1 36.2,-63.5 36.2,-62 36.2,-61.2 36,-61 35.2,-61
GND_MCU on Top Layer "Bottom Layer-No Net" (solid, pour order 70): 41.4,-58.5 46,-53.9 48.1,-53.9 48.4,-54.2 48.4,-55.8 48.4,-58.6 48.1,-58.9 47.9,-59.1 46.2,-59.1 41.6,-59.1 41.4,-58.9
GND_MCU on Top Layer "Bottom Layer-No Net" (solid, pour order 72): 40.2,-65.1 41.7,-65.1 41.9,-65.1 42.6,-64.4 43.6,-63.4 46.1,-63.4 47.7,-63.4 47.9,-63.6 48,-63.7 48,-64.5 48,-68.6 47.6,-69 47.5,-69.1 42.2,-69.1 39,-69.1 38.2,-68.3 38.2,-65.9
12V on Top Layer "Bottom Layer-No Net" (solid, pour order 76): 58.5,-101 58.5,-112.992 59.3,-113.792 97.508,-113.792 98.2,-113.1 98.8,-112.5 98.8,-105.7 98.8,-103.2 98.5,-102.9 98.4,-102.8 97.7,-102.8 96,-102.8 95.8,-103 88.8,-110 84.3,-110 67,-110 65.6,-108.6 65.1,-108.1 65.1,-102.2 65.1,-101 64.6,-100.5 63.3,-100.5 59,-100.5 58.5,-101

## Keep-outs
Keep-Out Layer:
  the board outline again, w0.203

## Silkscreen, mask and mechanical layers (free items; w line width, h text height)
Top Overlay:
  lines w0.254: 60.7,-64 66.364,-64 66.364,-46.652 60.7,-46.652 60.7,-64 ; 61.3,-34.586 61.3,-24.586 65.8,-24.586 65.8,-34.586 61.3,-34.586 ; 87.131,-57.222 92.795,-57.222 92.795,-39.874 87.131,-39.874 87.131,-57.222
  text "PB3" at 25.2,-5 h1 r270
  text "PB4" at 27.6,-5 h1 r270
  text "PB5" at 30.3,-5 h1 r270
  text "PB10" at 32.7,-5 h1 r270
  text "PB11" at 35.3,-5 h1 r270
  text "PB12" at 37.8,-5 h1 r270
  text "PB13" at 40.4,-5 h1 r270
  text "PB14" at 48.2,-5 h1 r270
  text "PB15" at 50.9,-5 h1 r270
  text "GND" at 53.3,-5 h1 r270
  text "PA2" at 55.8,-5 h1 r270
  text "PA3" at 58.4,-5 h1 r270
  text "PA4" at 61,-5 h1 r270
  text "PA12" at 63.6,-5 h1 r270
  text "PA15" at 66,-5 h1 r270
  text "PB1" at 22.6,-5.1 h1 r270
  text "RX" at 8.5,-14 h1
  text "TX" at 8.4,-16.5 h1
  text "GND" at 8.5,-19 h1
  text "Val_X" at 61.1,-23.7 h1
  text "GND" at 8.5,-25.5 h1
  text "5V" at 62.756,-26.7 h1
  text "SWCLK" at 8.5,-27.9 h1
  text "GND" at 62.256,-28.9 h1
  text "SWDIO" at 8.5,-30.5 h1
  text "C_L" at 62.256,-31.3 h1
  text "RST" at 8.5,-33 h1
  text "C_H" at 62.356,-33.3 h1
  text "3.3V" at 8.5,-35.4 h1
  text "GND" at 8,-41.8 h1
  text "3.3V" at 8,-44.3 h1
  text "MO_X" at 61.5,-45.8 h1
  text "PA0" at 8.1,-46.8 h1
  text "CAN_L" at 61.2,-49.552 h1
  text "CAN_H" at 61.2,-52.052 h1
  text "GND" at 8,-53 h1
  text "5V" at 62.4,-54.652 h1
  text "3.3V" at 8,-55.5 h1
  text "GND" at 62,-57.052 h1
  text "PA1" at 8.1,-58 h1
  text "GND" at 62,-59.652 h1
  text "VMO" at 62,-62.352 h1
  text "GND" at 8.4,-65.7 h1
  text "3.3V" at 8.4,-67.3 h1
  text "CS" at 8.4,-68.8 h1
  text "SCLK" at 8.4,-70.3 h1
  text "MOSI" at 8.5,-71.8 h1
  text "MISO" at 8.5,-73.4 h1
  text "PWM_LED1" at 86.8,-86 h1
  text "GND" at 86.8,-88.5 h1
  text "VCC" at 86.9,-91 h1
  text "PWM_LED2" at 86.7,-99 h1
  text "12V" at 67.2,-99.7 h1 r90
  text "5V" at 69.7,-99.8 h1 r90
  text "GND2" at 73.7,-100 h1 r90
  text "GND1" at 79.2,-100.1 h1 r90
  text "24V" at 84,-100.1 h1 r90
  text "GND" at 86.7,-101.5 h1
  text "VCC" at 86.8,-104 h1
Mechanical 1:
  lines w0.254: -109.39,-61.595 -67.89,-61.595
Mechanical 3:
  lines w0.254: 0,-15 103.045,-15

## Text inside footprints (layer, text, board x,y; h text height)
L1: Mechanical 17 "LEAD LENGTH:12.7MM" at 26.866,-117.938 h1 r90